# Altium PCB ESC.PcbDoc (part 3 of 3)
Units mm, origin at the board's own origin, x right, y up, seen from the top; angles counter-clockwise.
Board outline 85 x 45 mm, 4 copper layers (L1-SIGNAL/PWR, L2-PWR, L3-GND, L4-SIGNAL/PWR), stack 1.571 mm thick; 139 components, 88 nets, 499 pads, 911 vias.
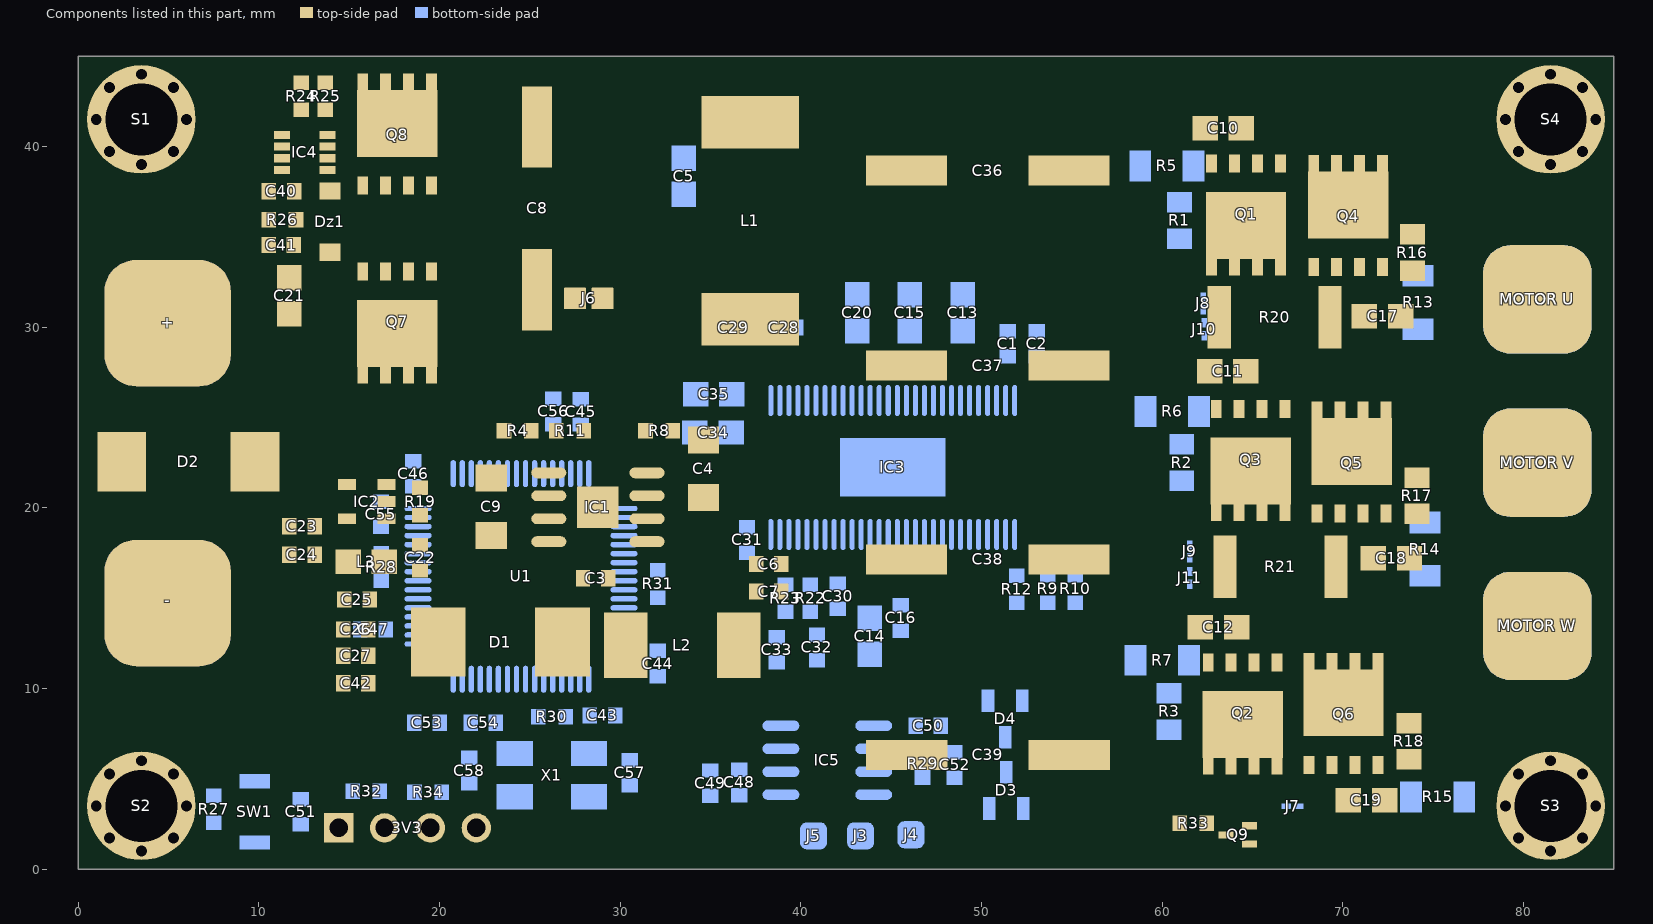
[diagram p5: the components of this part, seen from the top]

## Dimensions (continued)
0,45 to 85,45 on Mechanical 10
3.5,3.5 to 81.5,3.5 on Mechanical 10
3.5,3.5 to 3.5,41.5 on Mechanical 10